# Altium PCB Safety_Lock.PcbDoc (part 1 of 2)
Units mil, origin at the board's own origin, x right, y up, seen from the top; angles counter-clockwise.
Board outline 3784.65 x 3766.54 mil, 2 copper layers (Top Layer, Bottom Layer), stack 50 mil thick; 87 components, 62 nets, 322 pads, 500 vias.
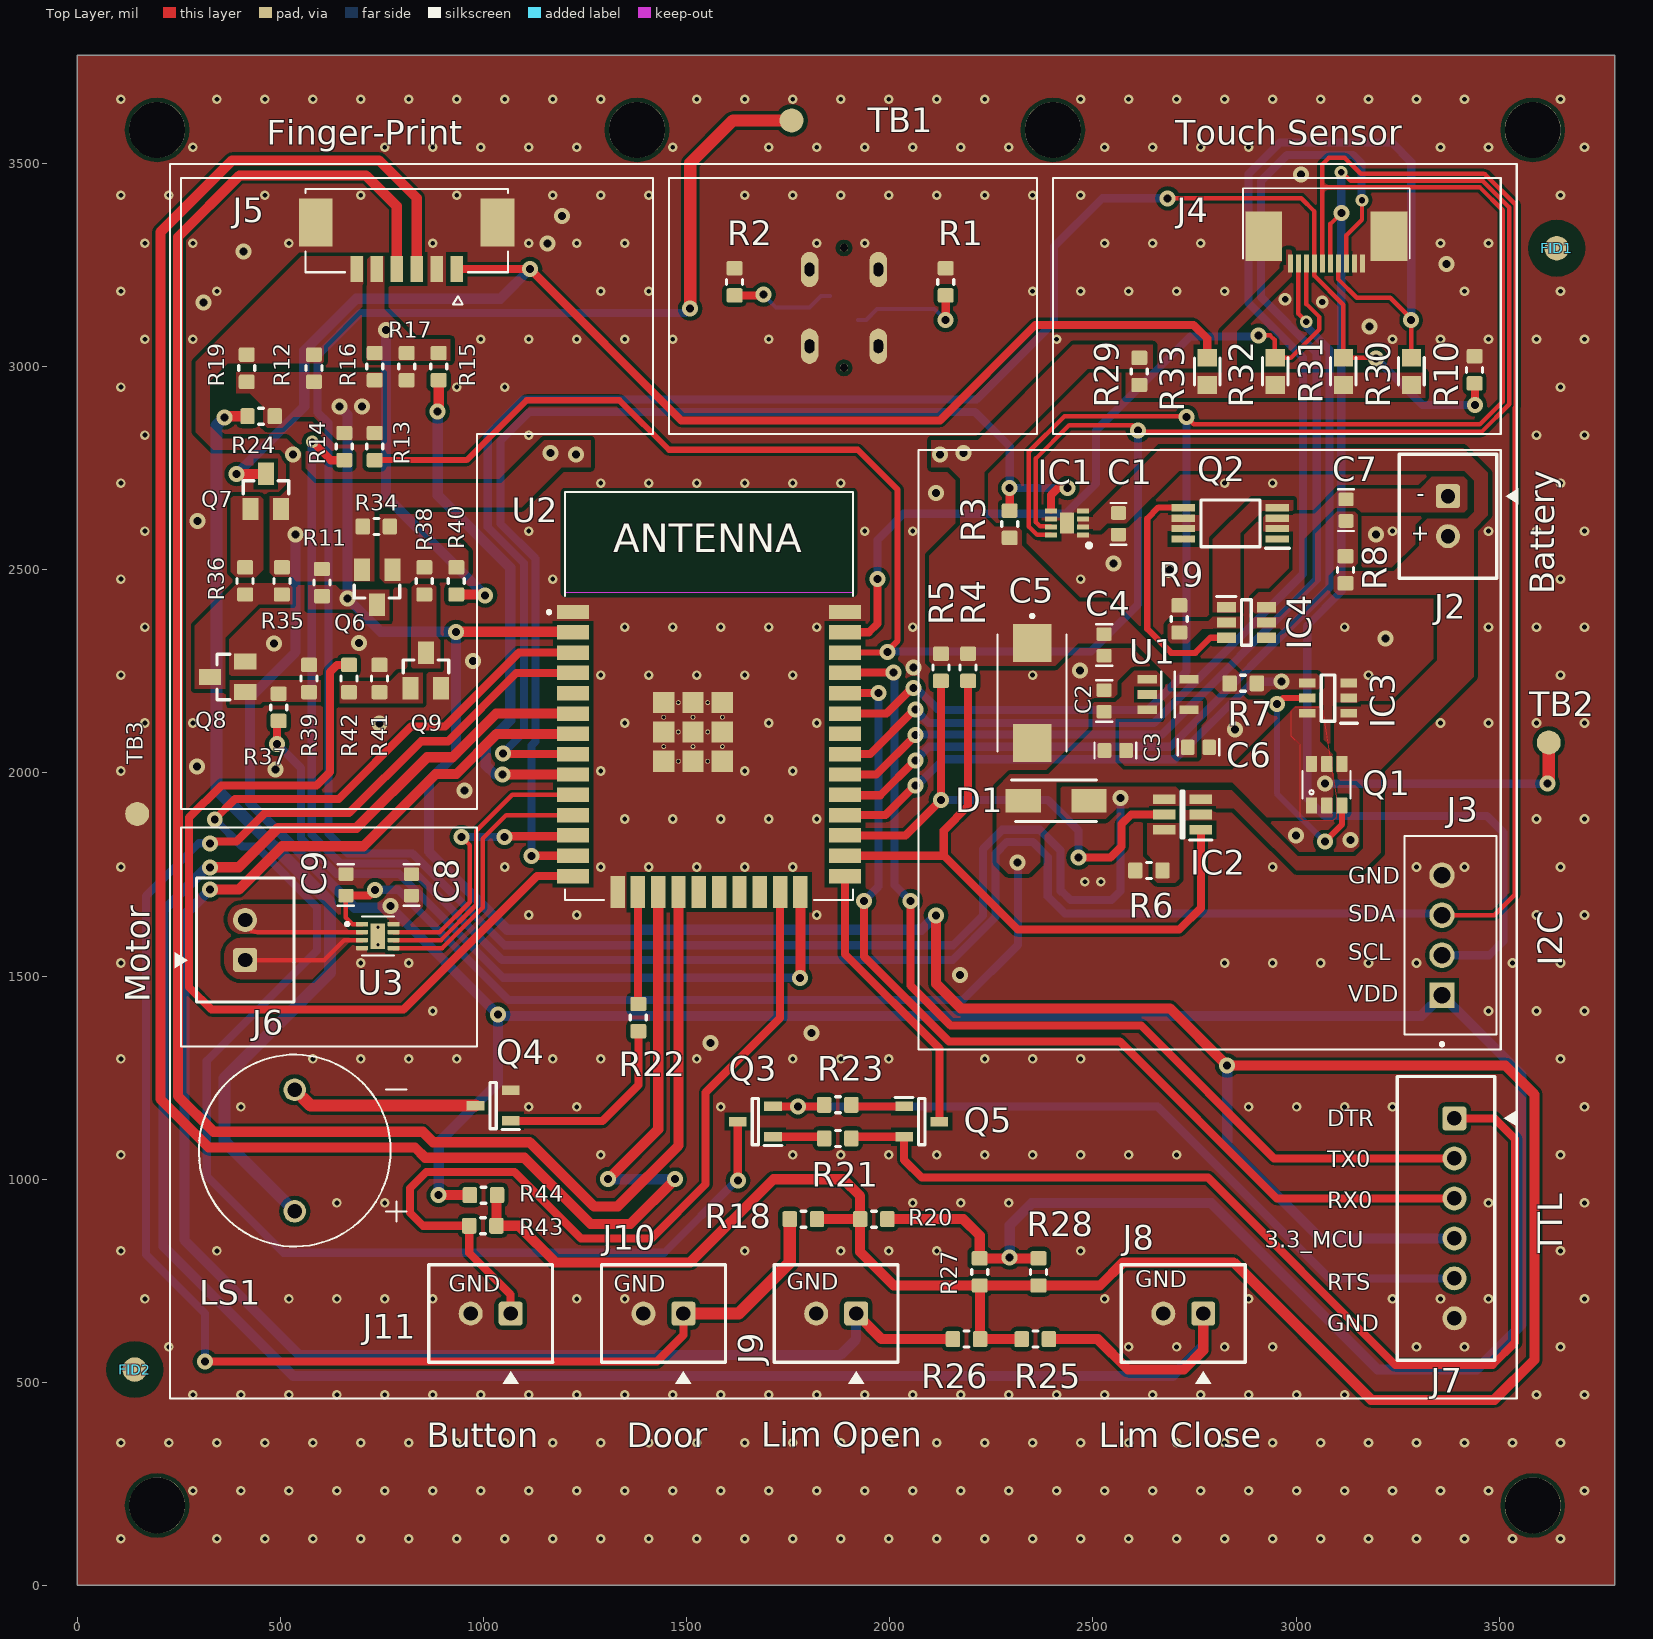
[diagram p0: Top Layer view]
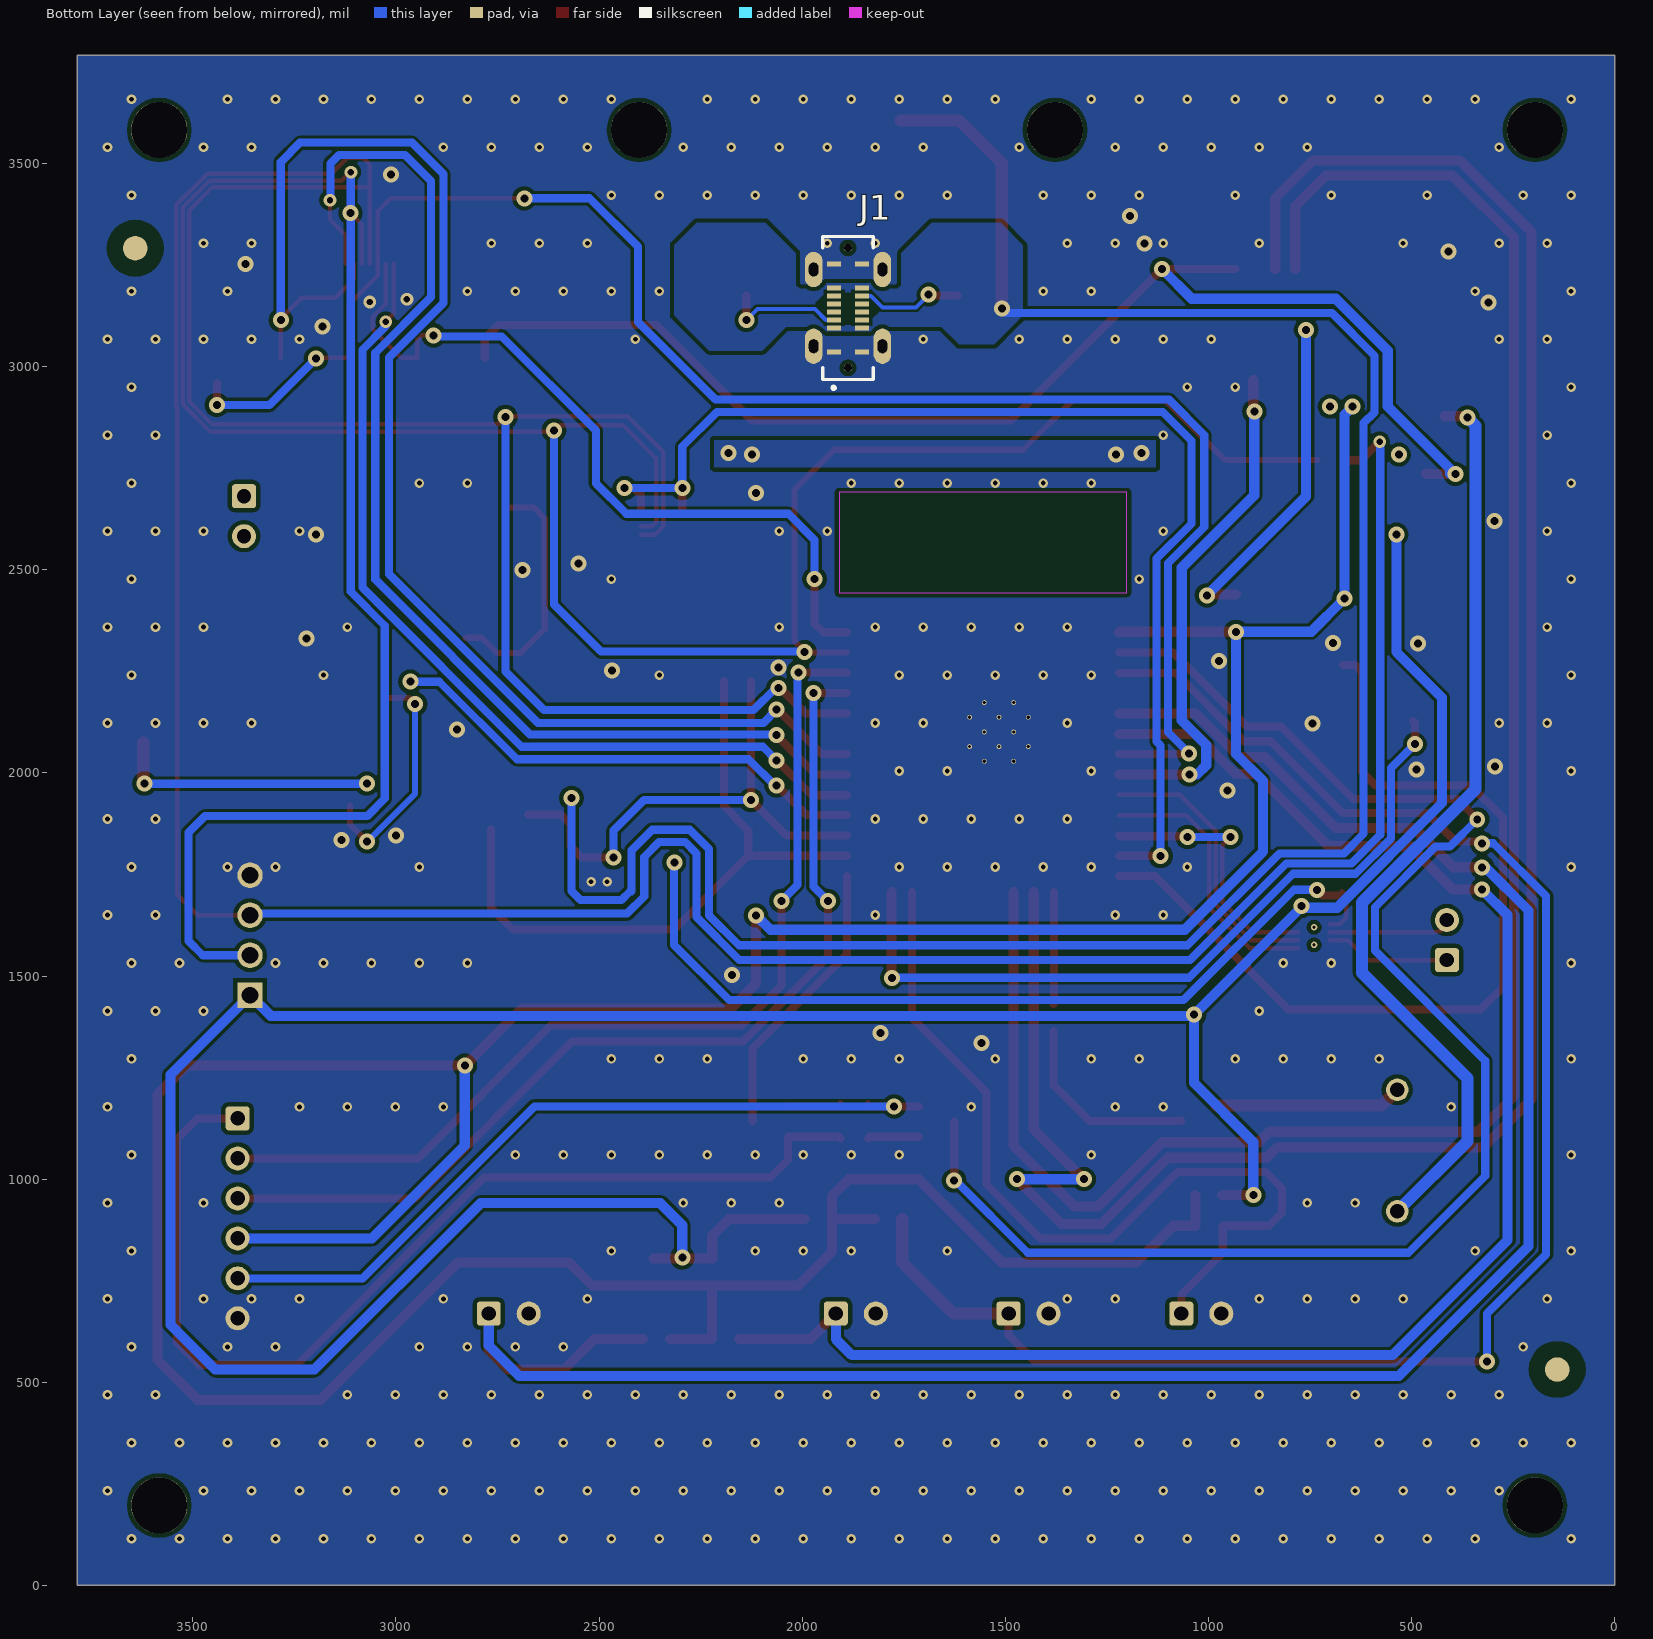
[diagram p1: Bottom Layer view, seen from below]
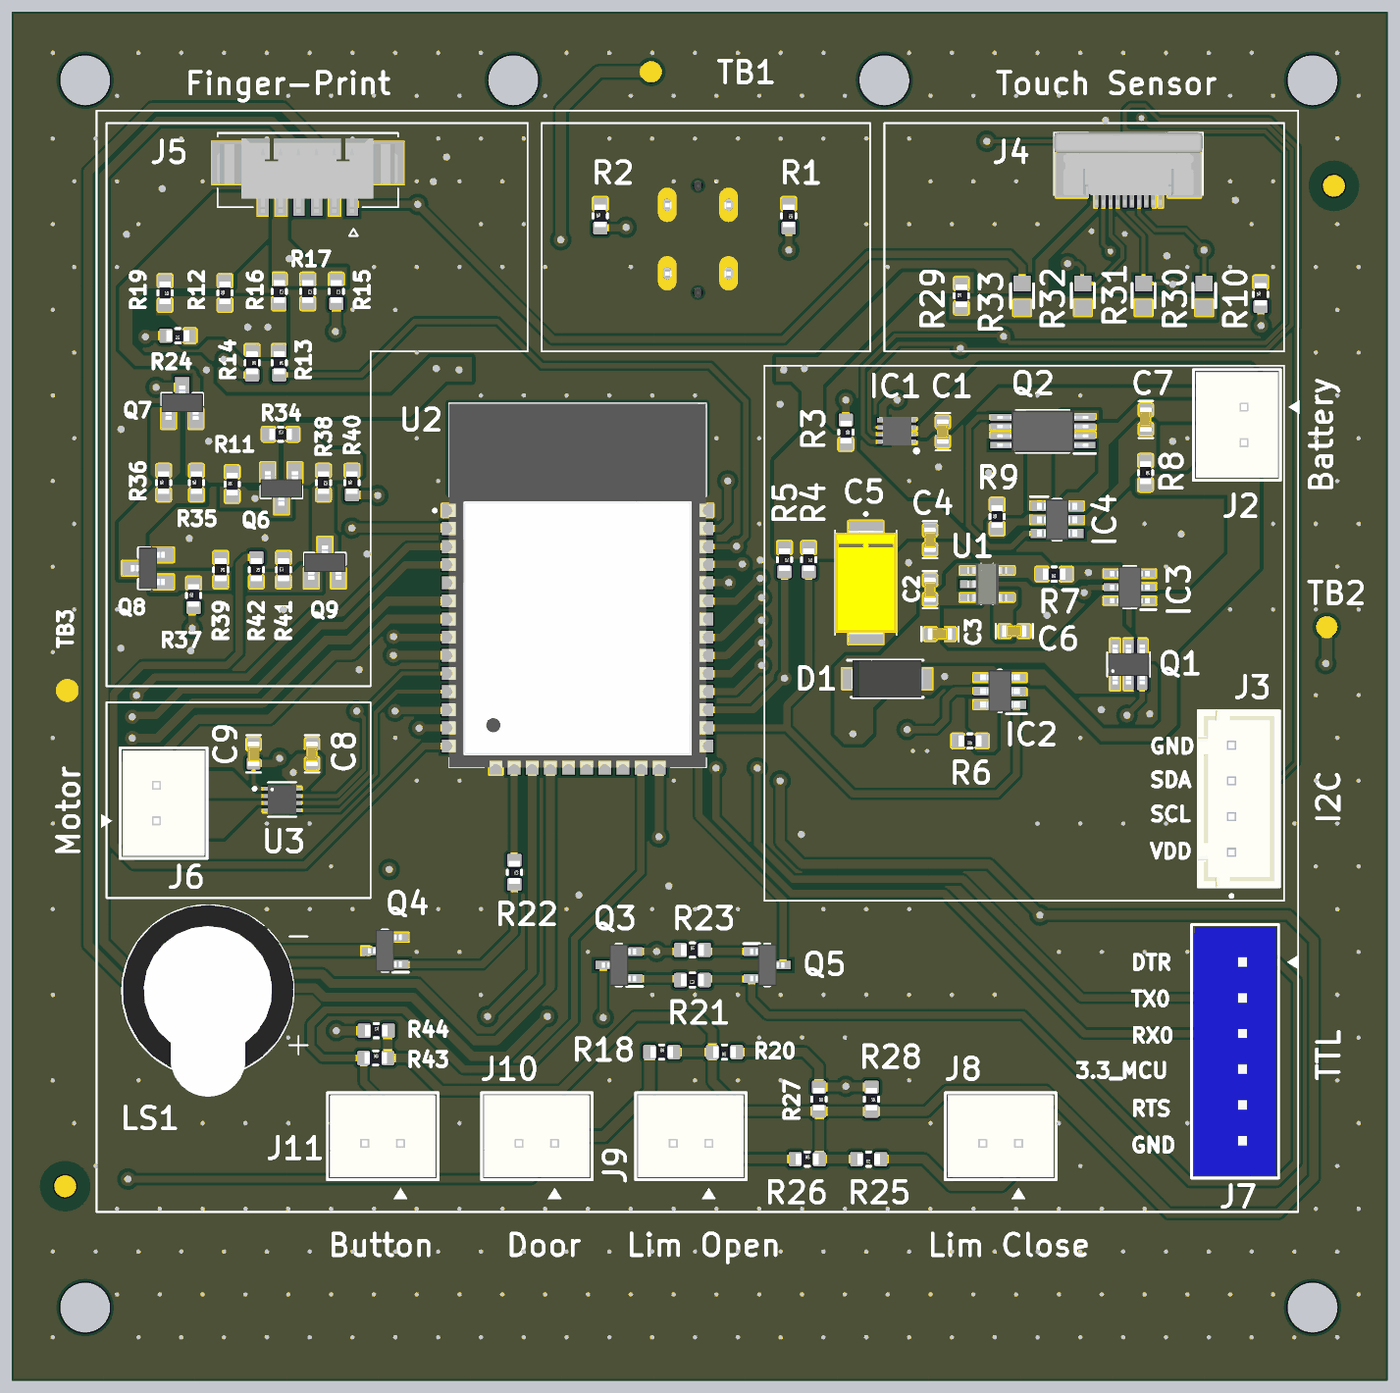
[diagram p3: 3D render of the assembled board from above, using the file's embedded part models]

## Layer stack, top to bottom
Top Solder: solder mask 0.787, Solder Resist, Dk 4.05
Top Layer: signal copper 1.378
Dielectric 1: prepreg 47.2441, PP-017, Dk 4.25
Bottom Layer: signal copper 1.378
Bottom Solder: solder mask 0.787, Solder Resist, Dk 4.05

## Board outline
0,0 0,3766.54 3784.65,3766.54 3784.64,0

## Design rules (kind name [scope] priority, off if disabled: settings)
Clearance Clearance_Fiducial [(ObjectKind = 'Pad') And (AsMils(PadXSize_AllLayers) = 60.236) And (AsMils(PadYSize_AllLayers) = 60.236)] p1: gap=39.37 ignorepadtopadclearanceinfootprint=FALSE except(0: Arc-Hole Track-Hole SMDPad-Hole THPad-Hole Via-Hole Fill-Hole Poly-Hole Region-Hole Text-Hole)
Clearance ViaToVia [IsVia vs IsVia] p2: gap=10 ignorepadtopadclearanceinfootprint=TRUE
Clearance "Stitching GND" [IsStitchingVia and InNet('GND') vs (IsVia and (Not IsStitchingVia)) Or IsPad] p3: gap=10 ignorepadtopadclearanceinfootprint=TRUE
Clearance [All] p4: gap=7 ignorepadtopadclearanceinfootprint=TRUE except(0: THPad-Region Region-Hole; 5: Arc-Track Track-Track; 10: Arc-THPad Arc-Via Track-THPad Track-Via SMDPad-THPad SMDPad-Via SMDPad-Fill SMDPad-Poly SMDPad-Region THPad-THPad THPad-Via THPad-Fill THPad-Poly Via-Via Via-Fill Via-Poly Via-Region Fill-Fill Fill-Poly Fill-Region Poly-Poly Poly-Region Region-Region)
DiffPairsRouting DiffPair_90DiffPairsRouting [InDifferentialPairClass('DIFF90')] p1: maxlimit=5 minlimit=5 mostfreqgap=5 toplayer_minwidth=8.44 toplayer_maxwidth=8.44 toplayer_prefwidth=8.44 bottomlayer_minwidth=8.44 bottomlayer_maxwidth=8.44 bottomlayer_prefwidth=8.44 impedanceprofiledriven=TRUE impedanceprofileid={2655DFD1-56F1-4E8B-8914-240DB396785B} impedanceprofilevalue=90.000000 maxuncoupledlength=500
DiffPairsRouting DiffPair_100DiffPairsRouting [InDifferentialPairClass('DIFF100')] p2: maxlimit=5 minlimit=5 mostfreqgap=5 toplayer_minwidth=6.12 toplayer_maxwidth=6.12 toplayer_prefwidth=6.12 bottomlayer_minwidth=6.12 bottomlayer_maxwidth=6.12 bottomlayer_prefwidth=6.12 impedanceprofiledriven=TRUE impedanceprofileid={77076357-942B-4C59-99A0-622BCAD36B52} impedanceprofilevalue=100.000000 maxuncoupledlength=500
FabricationTestPointUsage TestPointUsage [All] p1: valid=0 allowmultiple=FALSE
FabricationTestpoint Testpoint [(IsPad And (OnTopLayer Or OnBottomLayer))] p1: side=3 testpointundercomponent=TRUE minsize=40 maxsize=100 preferedsize=60 minholesize=0 maxholesize=40 preferedholesize=32 testpointgrid=1 allowsidetop=TRUE allowsidebottom=TRUE usegrid=TRUE gridtolerance=0.01
PlaneConnect [All] p1: planeconnectstyle=NoConnect reliefexpansion=20 reliefentries=4 reliefconductorwidth=10 reliefairgap=10
PolygonConnect VIA [ISVIA] p1: connectstyle=Direct reliefconductorwidth=30 reliefentries=4 polygonreliefangle="90 Angle" airgapwidth=10
PolygonConnect PolygonConnect_1 [All] p2: connectstyle=Direct reliefconductorwidth=20 reliefentries=4 polygonreliefangle="90 Angle" airgapwidth=10
RoutingVias [All] p1: holewidth=8 width=16 viastyle="Through Hole" minholewidth=8 minwidth=16 maxholewidth=30 maxwidth=60
SilkToSolderMaskClearance SilkscreenOverComponentPads [IsPad] p1: minsilkscreentomaskgap=10 clearancetoexposedcopper=TRUE
SolderMaskExpansion [All] p1: expansion=4 istentingtop=FALSE
UnRoutedNet [All] p1: checkbadconnections=TRUE
Width [All] p1: maxlimit=200 minlimit=5 preferedwidth=5 minimp=50.000000 maximp=50.000000 favimp=50.000000
24 further rules are at their usual default settings.

## Classes and differential pairs
component class U_Motor_Driver: C8 C9 U3
component class U_MCU: LS1 Q3 Q4 Q5 R10 R11 R12 R13 R14 R15 R16 R17 R18 R19 R20 R21 R22 R23 R24 R25 R26 R27 R28 R43 R44 U2
component class U_FingerPrint_TS: Q6 Q7 Q8 Q9 R34 R35 R36 R37 R38 R39 R40 R41 R42
component class U_Power_management: C1 C2 C3 C4 C5 C6 C7 D1 IC1 IC2 IC3 IC4 J2 Q1 Q2 R3 R4 R5 R6 R7 R8 R9 TB1 TB2 TB3 U1
component class U_Connectors: J3 J4 J5 J6 J7 J8 J9 J10 J11 R29 R30 R31 R32 R33
component class Top_level: FID1 FID2 J1 R1 R2

## Components (designator, comment, footprint, x,y, rotation, side; value= is the part's Value field where it differs from the comment)
C1 "0.1uF" 0603-C 2562.99,2613.19 r270 top
C2 "0.1uF" 0603-C 2527.56,2177.17 r90 top
C3 "22uF" 0603-C 2555.12,2055.12 r0 top
C4 "0.1uF" 0603-C 2527.56,2314.96 r270 top
C5 "T493X227K010BH6420_220uF" CAPPM7343X430N 2350.39,2196.85 r270 top
C6 "10nF" 0603-C 2759.84,2062.99 r0 top
C7 "0.1uF" 0603-C 3123.03,2646.65 r90 top
C8 "0.1uF" 0603-C 822.83,1724.41 r90 top
C9 "0.1uF" 0603-C 661.42,1724.41 r90 top
D1 "SS34A" DIOM5026X262N 2409.45,1931.52 r0 top
FID1 "fiducial" Fiducial 3641.73,3291.34 r90 top
FID2 "fiducial" Fiducial 141.73,531.5 r90 top
IC1 "MAX17048G+T10" SON50P200X200X80-9N-D 2436.21,2615.16 r180 top
IC2 "TP4057-42-SOT26-R" SOT95P280X125-6N 2720.47,1897.64 r180 top
IC3 "LTC4412HVIS6#TRMPBF" SOT95P280X100-6N 3078.74,2183.98 r180 top
IC4 "DW01A-G" SOT95P280X135-6N 2877.95,2370.08 r0 top
J1 "USB4120-03-C_REVA" GCT_USB4120-03-C_REVA 1887.32,3144.61 r90 bottom
J2 "455-2247-ND" CON_HDR1x2 3374.02,2681.1 r270 top
J3 "B4B-XH-A(LF)(SN)" JST_B4B-XH-A(LF)(SN) 3359.25,1452.76 r90 top
J4 "1-1734592-0" 117345920 3074.8,3346.26 r180 top
J5 "532610671" MOLEX_532610671 811.02,3334.65 r180 top
J6 "455-2247-ND" CON_HDR1x2 413.39,1539.37 r90 top
J7 "B6B-XH-A" CON_HDR1x6_2p50_SHRD_JST-B6B-XH-A 3389.76,1149.61 r270 top
J8 "455-2247-ND" CON_HDR1x2 2771.65,669.29 r180 top
J9 "455-2247-ND" CON_HDR1x2 1917.32,669.29 r180 top
J10 "455-2247-ND" CON_HDR1x2 1492.13,669.29 r180 top
J11 "455-2247-ND" CON_HDR1x2 1066.93,669.29 r180 top
LS1 "AI-1223-TWT-3V-2-R" XDCR_AI-1223-TWT-3V-2-R 535.37,1070.46 r180 top
Q1 "FDC606P" SUPERSOT-6 3075.48,1971.02 r0 top
Q2 "FS8205A" SOP65P640X120-8N 2838.58,2614.17 r180 top
Q3 "MMBT2222A-G" SOT95P240X115-3N 1669.29,1141.73 r180 top
Q4 "MMBT2222A-G" SOT95P240X115-3N 1023.62,1181.1 r180 top
Q5 "MMBT2222A-G" SOT95P240X115-3N 2078.74,1141.73 r0 top
Q6 "MI2301" SOT23 738.19,2456.69 r180 top
Q7 "KST8550D" SOT23 464.57,2692.91 r0 top
Q8 "MMBT8050D" SOT23 370.08,2236.22 r90 top
Q9 "MMBT8050D" SOT23 858.27,2251.97 r0 top
R1 "5.1k" 0603-R 2137.8,3208.66 r270 top
R2 "5.1k" 0603-R 1618.11,3208.66 r90 top
R3 "4.7k" 0603-R 2295.28,2612.14 r270 top
R4 "4.7k" 0603-R 2192.91,2259.84 r270 top
R5 "4.7k" 0603-R 2125.98,2259.84 r270 top
R6 "1.66k" 0603-R 2637.8,1759.84 r180 top
R7 "470k" 0603-R 2870.08,2220.47 r180 top
R8 "100R" 0603-R 3122.05,2500 r270 top
R9 "1k" 0603-R 2712.6,2379 r90 top
R10 "4.7K" 0603-R 3439.61,2992.13 r90 top
R11 "NC" 0603-R 602.36,2468.5 r90 top
R12 "NC" 0603-R 582.68,2996.06 r90 top
R13 "4.7K" 0603-R 732.28,2803.15 r270 top
R14 "4.7K" 0603-R 657.48,2803.15 r270 top
R15 "0R" 0603-R 889.76,3000 r270 top
R16 "4.7K" 0603-R 732.28,3000 r270 top
R17 "4.7K" 0603-R 811.02,3000 r270 top
R18 "4.7K" 0603-R 1787.4,901.57 r0 top
R19 "NC" 0603-R 417.32,2996.06 r270 top
R20 "NC" 0603-R 1960.63,901.57 r180 top
R21 "12k" 0603-R 1872.05,1100.39 r180 top
R22 "220R" 0603-R 1381.17,1397.64 r270 top
R23 "12k" 0603-R 1872.05,1183.07 r0 top
R24 "100R" 0603-R 452.76,2877.95 r180 top
R25 "4.7K" 0603-R 2358.27,606.3 r180 top
R26 "4.7K" 0603-R 2188.98,606.3 r0 top
R27 "NC" 0603-R 2221.39,771.65 r270 top
R28 "NC" 0603-R 2366.14,771.65 r270 top
R29 "NC" 0603-R 2614.17,2988.19 r90 top
R30 "10K" 0603R 3283.92,2988.19 r90 top value=1K
R31 "10K" 0603R 3116.49,2988.19 r90 top value=1K
R32 "10K" 0603R 2949.05,2988.19 r90 top value=1K
R33 "0R" 0603R 2781.61,2988.19 r270 top value=1K
R34 "100K" 0603-R 736.22,2606.3 r0 top
R35 "100K" 0603-R 503.94,2472.44 r90 top
R36 "1K" 0603-R 413.39,2472.44 r90 top
R37 "1K" 0603-R 496.06,2161.42 r90 top
R38 "1K" 0603-R 854.33,2472.44 r270 top
R39 "10K" 0603-R 570.87,2232.28 r270 top
R40 "1K" 0603-R 933.07,2472.44 r90 top
R41 "10K" 0603-R 744.09,2232.28 r90 top
R42 "1K" 0603-R 669.29,2232.28 r270 top
R43 "4.7K" 0603-R 998.47,885.33 r0 top
R44 "NC" 0603-R 1000,960.63 r0 top
TB1 "Test_Pad" Test_Pad 1758.4,3605.96 r0 top
TB2 "Test_Pad" Test_Pad 3622.05,2074.8 r90 top
TB3 "Test_Pad" Test_Pad 147.64,1899.16 r90 top
U1 "SPX3819M5-L-3-3/TR" SOT23-5 2685.04,2192.91 r180 top
U2 "Esp32" MODULE_ESP32-WROOM-32 1555.12,2188.98 r0 top
U3 "DRV8837CDSGR" SON50P200X200X80-9N 740.16,1598.42 r0 top

## Footprints (in the part's own frame and the unit in brackets; to place one, negate y for a bottom-side part, rotate by r counter-clockwise, add the part's x,y. Pads: shape width x height; smd on the part's side, far side on the other; paste and mask are expansions set on the pad)
0603-C [mm] "Capacitor 0603 Nominal Density"
  rrect25% 0.85x0.95 smd: 1(-0.675,0) 2(0.675,0)
  silkscreen extent -1.3,-0.5 1.3,0.5, body extent -0.88,-0.43 0.87,0.44, height 0.95
0603-R [mm] "Resistor 0603 Medium Density"
  rrect25% 0.9x1 smd: 1(-0.85,0) 2(0.85,0)
  silkscreen extent -0.15,-0.5 0.15,0.5, body extent -0.8,-0.4 0.8,0.4, height 0.3
0603R [mm]
  rect 1.1x1.2 smd: 1(-0.85,0) 2(0.85,0)
  silkscreen extent -0.85,-0.8 0.86,0.8
117345920 [mm]
  rect 0.3x1.1 smd: 1(-2.25,2.35) 2(-1.75,2.35) 3(-1.25,2.35) 4(-0.75,2.35) 5(-0.25,2.35) 6(0.25,2.35) 7(0.75,2.35) 8(1.25,2.35) 9(1.75,2.35) 10(2.25,2.35)
  rect 2.3x3.1 smd: MP1(-3.92,0.65) MP2(3.92,0.65)
  silkscreen extent -5.22,-2.35 5.22,2.05, body extent -5.22,-2.37 5.22,2.74, height 2.05
CAPPM7343X430N [mm]
  rect 2.37x2.41 smd: 1(-3.125,0) 2(3.125,0)
  silkscreen extent -4.91,-2.15 3.65,2.15, body extent -3.65,-2.15 3.65,2.15, height 4.3
CON_HDR1x2 [mm] "Connector 2-Way 2.50mm Pitch Right Angle Shrouded JST S2B-XH-A"
  rrect25% 1.5x1.5 / inner round 1.5 / far side rrect25% 1.5x1.5 hole 0.9: 1(0,0)
  round 1.5 hole 0.9: 2(2.5,0)
  silkscreen extent -2.63,-3.05 5.13,4.4, body extent -2.45,-2.88 4.95,2.87, height 7
CON_HDR1x6_2p50_SHRD_JST-B6B-XH-A [mm] "Connector 6-Way 2.50mm Pitch Right Angle Shrouded JST-B6B-XH-A"
  rrect25% 1.5x1.5 / inner round 1.5 / far side rrect25% 1.5x1.5 hole 0.9: 1(0,0)
  round 1.5 hole 0.9: 2(2.5,0) 3(5,0) 4(7.5,0) 5(10,0) 6(12.5,0)
  silkscreen extent -2.62,-3.58 15.13,3.9, body extent -2.45,-3.38 14.95,2.37, height 7
DIOM5026X262N [mm]
  rect 2.2x1.45 smd: 1(-2.05,0) 2(2.05,0)
  silkscreen extent -2.78,-1.3 2.52,1.3, body extent -2.52,-1.3 2.52,1.3, height 2.62
Fiducial [mm]
  round 1.53 all layers, no hole mask+0.102: 1(0,0)
GCT_USB4120-03-C_REVA [mm]
  rect 0.3x0.87 smd: A1(-2.75,0.865) A4(-1.25,0.865) A5(-0.75,0.865) A6(-0.25,0.865) A7(0.25,0.865) A8(0.75,0.865) A9(1.25,0.865) A12(2.75,0.865) B1(2.75,-0.865) B4(1.25,-0.865) B5(0.75,-0.865) B6(0.25,-0.865) B7(-0.25,-0.865) B8(-0.75,-0.865) B9(-1.25,-0.865) B12(-2.75,-0.865)
  oval 2.2x1.1 hole 0.6 slot 0.85 at 0 deg: S1(-2.4,2.15) S2(-2.4,-2.15) S3(2.4,2.15) S4(2.4,-2.15)
  round 0.52 hole 0.52 unplated: ""(-3.75,0) ""(3.75,0)
  silkscreen extent -5.1,-1.58 4.47,1.58, body extent -4.5,-2.29 4.44,2.31, height 6.5
JST_B4B-XH-A(LF)(SN) [mm]
  rect 1.59x1.59 hole 1.06: 1(0,0)
  round 1.59 hole 1.06: 2(2.5,0) 3(5,0) 4(7.5,0)
  silkscreen extent -3.16,-3.4 9.95,2.35, body extent -2.45,-3.4 9.95,2.35, height 7
MODULE_ESP32-WROOM-32 [mm]
  rect 2x0.9 smd: 1(-8.5,5.26) 2(-8.5,3.99) 3(-8.5,2.72) 4(-8.5,1.45) 5(-8.5,0.18) 6(-8.5,-1.09) 7(-8.5,-2.36) 8(-8.5,-3.63) 9(-8.5,-4.9) 10(-8.5,-6.17) 11(-8.5,-7.44) 12(-8.5,-8.71) 13(-8.5,-9.98) 14(-8.5,-11.25) 25(8.5,-11.25) 26(8.5,-9.98) 27(8.5,-8.71) 28(8.5,-7.44) 29(8.5,-6.17) 30(8.5,-4.9) 31(8.5,-3.63) 32(8.5,-2.36) 33(8.5,-1.09) 34(8.5,0.18) 35(8.5,1.45) 36(8.5,2.72) 37(8.5,3.99) 38(8.5,5.26)
  rect 0.9x2 smd: 15(-5.715,-12.25) 16(-4.445,-12.25) 17(-3.175,-12.25) 18(-1.905,-12.25) 19(-0.635,-12.25) 20(0.635,-12.25) 21(1.905,-12.25) 22(3.175,-12.25) 23(4.445,-12.25) 24(5.715,-12.25)
  rect 1.33x1.33 smd: 39_1(-2.835,-0.405) 39_2(-1,-0.405) 39_3(0.835,-0.405) 39_4(-2.835,-2.24) 39_5(-1,-2.24) 39_6(0.835,-2.24) 39_7(-2.835,-4.075) 39_8(-1,-4.075) 39_9(0.835,-4.075)
  round 0.3 hole 0.2: 39_10(-1.917,-0.405) 39_11(-0.082,-0.405) 39_12(-2.835,-1.322) 39_13(-1,-1.322) 39_14(0.835,-1.322) 39_15(-1.917,-2.24) 39_16(-0.082,-2.24) 39_17(-2.835,-3.157) 39_18(-1,-3.157) 39_19(0.835,-3.157) 39_20(-1.917,-4.075) 39_21(-0.082,-4.075)
  Keep-Out Layer region: 9,6.45 -9,6.45 -9,12.75 9,12.75
  Keep-Out Layer region: 9,6.45 -9,6.45 -9,12.75 9,12.75
  silkscreen extent -10.1,-12.75 9,12.75, body extent -9,-12.75 9,12.75, height 3.2
MOLEX_532610671 [mm]
  rect 0.8x1.6 smd mask+0: 1(-3.125,2.4) 2(-1.875,2.4) 3(-0.625,2.4) 4(0.625,2.4) 5(1.875,2.4) 6(3.125,2.4)
  rect 2.1x3 smd mask+0: S1(-5.675,-0.5) S2(5.675,-0.5)
  silkscreen extent -6.32,-2.6 6.32,4.6, body extent -6.3,-2.22 6.35,2.98, height 3.4
SON50P200X200X80-9N [mm]
  rrect25% 0.74x0.28 smd: 1(-0.985,0.75) 2(-0.985,0.25) 3(-0.985,-0.25) 4(-0.985,-0.75) 5(0.985,-0.75) 6(0.985,-0.25) 7(0.985,0.25) 8(0.985,0.75)
  rect 0.9x1.6 smd paste-2: 9(0,0)
  round 0.4 hole 0.2 mask+0: 9_1(0,0.55) 9_2(0,-0.55)
  silkscreen extent -2.02,-1.21 1,1.21, body extent -1,-1 1,1, height 0.8
SON50P200X200X80-9N-D [mm]
  rect 0.75x0.3 smd: 1(-1,0.75) 2(-1,0.25) 3(-1,-0.25) 4(-1,-0.75) 5(1,-0.75) 6(1,-0.25) 7(1,0.25) 8(1,0.75)
  rect 0.9x1.3 smd: 9(0,0)
  silkscreen extent -1.5,1.28 -1.25,1.52, body extent -1.05,-1 1.05,1, height 0.8
SOP65P640X120-8N [mm]
  rect 1.475x0.45 smd: 1(-2.938,0.975) 2(-2.938,0.325) 3(-2.938,-0.325) 4(-2.938,-0.975) 5(2.938,-0.975) 6(2.938,-0.325) 7(2.938,0.325) 8(2.938,0.975)
  silkscreen extent -3.67,-1.47 1.85,1.55, body extent -3.2,-1.47 3.2,1.47, height 1.2
SOT23 [mm]
  rect 1x1.4 smd: 1(-0.95,-1.1) 2(0.95,-1.1) 3(0,1.1)
  silkscreen extent -1.42,-0.15 1.42,0.66, body extent -1.45,-1.2 1.45,1.2, height 1.11
SOT23-5 [mm]
  rect 1.2x0.55 smd: 1(1.3,-0.95) 2(1.3,0) 3(1.3,0.95) 4(-1.3,0.95) 5(-1.3,-0.95)
  silkscreen extent -0.43,-1.42 0.43,1.42, body extent -1.4,-1.45 1.4,1.45, height 1.45
SOT95P240X115-3N [mm]
  rect 1.1x0.6 smd: 1(-1.1,0.95) 2(-1.1,-0.95) 3(1.1,0)
  silkscreen extent -1.65,-1.45 0.2,1.5, body extent -1.2,-1.45 1.2,1.45, height 1.15
SOT95P280X100-6N [mm]
  rect 1.05x0.55 smd: 1(-1.3,0.95) 2(-1.3,0) 3(-1.3,-0.95) 4(1.3,-0.95) 5(1.3,0) 6(1.3,0.95)
  silkscreen extent -1.83,-1.45 0.43,1.58, body extent -1.4,-1.45 1.4,1.45, height 1
SOT95P280X125-6N [mm]
  rect 1.4x0.6 smd: 1(-1.15,0.95) 2(-1.15,0) 3(-1.15,-0.95) 4(1.15,-0.95) 5(1.15,0) 6(1.15,0.95)
  silkscreen extent -1.85,-1.46 0.1,1.6, body extent -1.4,-1.46 1.4,1.46, height 1.25
SOT95P280X135-6N [mm]
  rect 1.2x0.65 smd: 1(-1.25,0.95) 2(-1.25,0) 3(-1.25,-0.95) 4(1.25,-0.95) 5(1.25,0) 6(1.25,0.95)
  silkscreen extent -1.85,-1.43 0.3,1.63, body extent -1.4,-1.43 1.4,1.43, height 1.35
SUPERSOT-6 [mm]
  rrect15% 0.7x1 smd: 1(-0.95,-1.3) 2(0,-1.3) 3(0.95,-1.3) 4(0.95,1.3) 5(0,1.3) 6(-0.95,1.3)
  silkscreen extent -1.5,-0.85 1.5,0.85, body extent -1.45,-1.4 1.45,1.4, height 1
Test_Pad [mil]
  round 59.06 smd paste-29.53 mask+2: 1(0,0)
XDCR_AI-1223-TWT-3V-2-R [mm]
  round 1.408 hole 0.9: N(0,-3.8) P(0,3.8)
  silkscreen extent -6.98,-6 6,6, body extent -6.01,-6.03 5.99,7.41, height 7.65

## Part data
C1 C2 C3 C4 C6 C7 C8 C9: library part CAP, "CAP", Capacitance=1uF, Case Code (Imperial)=0805, Case Code (Metric)=2012, Manufacturer="TDK EPCOS", Manufacturer Part Number=B37941K9105K62, Max Operating Temperature=125°C, Min Operating Temperature=-55°C, Package Quantity=3000, Ratings=AEC-Q200, Supplier Part Number 1=495-1935-1-ND, Tolerance=10%, Voltage Rating=16V, Case/Package=0805, Category="Ceramic Capacitors", ComponentLink1Description=Datasheet, ComponentLink1URL=https://datasheet.ciiva.com/13389/upy-gphc-y5v-6-3v-to-50v-5-13389978.pdf?src-supplier=Mouser, ComponentLink2Description=http://components.arrow.com/part/dataview/0323_01879911?src-supplier=Arrow+Europe, ComponentLink2URL=http://components.arrow.com/part/dataview/0323_01879911?src-supplier=Arrow+Europe, ComponentLink3Description=https://media.digikey.com/pdf/Data%20Sheets/Epcos%20PDFs/B37872K_B37941K_Series.pdf?src-supplier=Digi-Key, ComponentLink3URL=https://media.digikey.com/pdf/Data%20Sheets/Epcos%20PDFs/B37872K_B37941K_Series.pdf?src-supplier=Digi-Key, Height=1.35mm, Lead Free="Lead Free", Length=0.079inch, Mount="Surface Mount", Packaging="Tape and Reel", RoHS=Yes, Supplier 1=Digi-Key, Thickness=0.049inch, Voltage Rating (DC)=16V, Width=0.049inch
C5: Package="SMD-2 Kemet", Availability="In Stock", Check_prices=https://www.snapeda.com/parts/T493X227K010BH6420/Kemet/view-part/?ref=eda, MF=Kemet, MP=T493X227K010BH6420, Price=None, SnapEDA_Link=https://www.snapeda.com/parts/T493X227K010BH6420/Kemet/view-part/?ref=snap
D1: "Diode", Manufacturer_Name="HY Electronic Corp", Datasheet Link=https://datasheet.datasheetarchive.com/originals/distributors/Datasheets-3/DSA-43252.pdf, Height=2.62mm, Manufacturer_Part_Number=SS34A
IC1: "Integrated Circuit", Manufacturer_Name="Maxim Integrated", Mouser Part Number=700-MAX17048G+T10, Arrow Part Number=MAX17048G+T10, Arrow Price/Stock=https://www.arrow.com/en/products/max17048gt10/maxim-integrated?region=nac, Datasheet Link=https://datasheets.maximintegrated.com/en/ds/MAX17048-MAX17049.pdf, Height=0.8mm, Manufacturer_Part_Number=MAX17048G+T10, Mouser Price/Stock=https://www.mouser.co.uk/ProductDetail/Maxim-Integrated/MAX17048G%2bT10?qs=D7PJwyCwLAoGnnn8jEPRBQ%3D%3D
IC2: "Integrated Circuit", Manufacturer_Name="Nanjing Extension Microelectronics", Datasheet Link=https://datasheet.lcsc.com/szlcsc/Nanjing-Extension-Microelectronics-TP4057_C12044.pdf, Height=1.25mm, Manufacturer_Part_Number=TP4057-42-SOT26-R
IC3: "Integrated Circuit", Manufacturer_Name="Linear Technology", Mouser Part Number=584-C4412HVIS6TRMPBF, Arrow Part Number=LTC4412HVIS6#TRMPBF, Arrow Price/Stock=https://www.arrow.com/en/products/ltc4412hvis6trmpbf/linear-technology, Datasheet Link=https://datasheet.datasheetarchive.com/originals/dk/DKDS-14/267243.pdf, Height=1mm, Manufacturer_Part_Number=LTC4412HVIS6#TRMPBF, Mouser Price/Stock=https://www.mouser.co.uk/ProductDetail/Analog-Devices-Linear-Technology/LTC4412HVIS6TRMPBF?qs=hVkxg5c3xu%2F0qD9zc%2Fd4vw%3D%3D
IC4: "Integrated Circuit", Manufacturer_Name="Fortune Semiconductor Corporation", Datasheet Link=http://acoptex.com/uploads/DW01A.pdf, Height=1.35mm, Manufacturer_Part_Number=DW01A-G
J1: Package=None, Availability=Unavailable, Check_prices=https://www.snapeda.com/parts/USB4120-03-C/Global%20Connector%20Technology/view-part/5160677/?ref=eda, MF="Global Connector Technology", MP=USB4120-03-C, Price=None, SnapEDA_Link=https://www.snapeda.com/parts/USB4120-03-C/Global%20Connector%20Technology/view-part/5160677/?ref=snap
J2 J6 J8 J9 J10 J11: library part CON_HDR1x2, ComponentLink1Description=Datasheet, ComponentLink1URL=https://www.jst-mfg.com/product/pdf/eng/eXH.pdf
J3: "Connector Header Through Hole 4 position 0.098 (2.50mm)", Package=None, Availability=Warning, Check_prices=https://www.snapeda.com/parts/B4B-XH-A(LF)(SN)/JST%20Sales%20America%20Inc./view-part/447494/?ref=eda, MF="JST Sales", MP=B4B-XH-A(LF)(SN), Price=None, Purchase-URL=https://pricing.snapeda.com/search/part/B4B-XH-A(LF)(SN)/?ref=eda, SnapEDA_Link=https://www.snapeda.com/parts/B4B-XH-A(LF)(SN)/JST%20Sales%20America%20Inc./view-part/447494/?ref=snap
J4: "Connector", Manufacturer_Name="TE Connectivity", Mouser Part Number=571-1-1734592-0, Arrow Part Number=1-1734592-0, Arrow Price/Stock=https://www.arrow.com/en/products/1-1734592-0/te-connectivity, Datasheet Link=https://www.te.com/commerce/DocumentDelivery/DDEController?Action=showdoc&DocId=Customer+Drawing%7F1734592%7FC%7Fpdf%7FEnglish%7FENG_CD_1734592_C_C_1734592.pdf%7F1-1734592-8, Height=2.3mm, Manufacturer_Part_Number=1-1734592-0, Mouser Price/Stock=https://www.mouser.co.uk/ProductDetail/TE-Connectivity/1-1734592-0?qs=sXy4Dx%2FMQpOH8ogf8%2FvwBg%3D%3D
J5: "Conn Shrouded Header (4 Sides) HDR 6 POS 1.25mm Solder RA Side Entry SMD PicoBladeâ„¢ T/R", Package=None, Check_prices=https://www.snapeda.com/parts/532610671/Molex/view-part/6379096/?ref=eda, Digi-Key_Part_Number=WM7624CT-ND, MF=Molex, MP=532610671, Purchase-URL=https://pricing.snapeda.com/search/part/532610671/?ref=eda, SnapEDA_Link=https://www.snapeda.com/parts/532610671/Molex/view-part/6379096/?ref=snap
J7: library part CON_HDR1x6_2p50_SHRD_JST_B6B-XH-A, "CONN HEADER VERT 6POS 2.5MM", Color=Natural, Contact Resistance=20mR, Current Rating=3A, Housing Color=White, Insulation Resistance=1GR, Manufacturer=JST, Manufacturer Part Number=B6BXHA(LF)(SN), Max Operating Temperature=85°C, Max Voltage Rating (AC)=250V, Min Operating Temperature=-25°C, Package Quantity=500, Supplier Part Number 1=455-2271-ND, Category="FFC / FPC", ComponentLink4Description=Datasheet, ComponentLink4URL=http://www.jst-mfg.com/product/pdf/eng/eXH.pdf, Connector Type="Male Pin", Contact Material=Brass, Contact Plating=Tin,Lead,Copper, Depth=5.75mm, Housing Material=Polyamide, Lead Free="Lead Free", Lead Pitch=2.5mm, Length=17.4mm, Max Current Rating=3A, Max Voltage Rating (DC)=250V, Mount="Through Hole", Number of Contacts=6, Number of Positions=6, Number of Rows=1, Orientation=Straight, Packaging=Bulk, Pitch=2.5mm, Pricing 1="1=0.270000, 10=0.258000, 100=0.180800, 500=0.154940, 1000=0.129120, 5000=0.110680, 10000=0.103300 (USD)", REACH SVHC="No SVHC", RoHS=Yes, Stock 1=19126, Supplier 1=Digi-Key, Termination=Press-Fit, Voltage Rating=250V, Voltage Rating (AC)=250V, Wire/Cable Gauge=22AWG
LS1: "AUDIO INDICATOR 82 DB 3 VDC 2300 HZ", Package=None, Availability="In Stock", Check_prices=https://www.snapeda.com/parts/AI-1223-TWT-3V-2-R/PUI%20Audio,%20Inc./view-part/548758/?ref=eda, MF="PUI Audio,", MP=AI-1223-TWT-3V-2-R, Price=None, Purchase-URL=https://pricing.snapeda.com/search/part/AI-1223-TWT-3V-2-R/?ref=eda, SnapEDA_Link=https://www.snapeda.com/parts/AI-1223-TWT-3V-2-R/PUI%20Audio,%20Inc./view-part/548758/?ref=snap
Q1: "P-Channel 12V 6A (Ta) 1.6W (Ta) Surface Mount SuperSOTâ„¢-6", Package="TSOT-23-6 ON Semiconductor", Availability=Good, Check_prices=https://www.snapeda.com/parts/FDC606P/ON%20Semiconductor/view-part/2501971/?ref=eda, MF="ON Semiconductor", MP=FDC606P, Price=None, Purchase-URL=https://pricing.snapeda.com/search/part/FDC606P/?ref=eda, SnapEDA_Link=https://www.snapeda.com/parts/FDC606P/ON%20Semiconductor/view-part/2501971/?ref=snap
Q2: "Transistor", Manufacturer_Name="SII Semiconductor", Datasheet Link=http://www.ic-fortune.com/upload/Download/FS8205A-DS-12_EN.pdf, Height=1.2mm, Manufacturer_Part_Number=FS8205A
Q3: library part MMBT2222A-G_Mirror, "Transistor BJT NPN", Manufacturer_Name="Comchip Technology", Mouser Part Number=750-MMBT2222A-G, Arrow Part Number=MMBT2222A-G, Arrow Price/Stock=https://www.arrow.com/en/products/mmbt2222a-g/comchip-technology, Datasheet Link=http://www.comchiptech.com/admin/files/product/MMBT2222A-G%20RevB.pdf, Height=1.15mm, Manufacturer_Part_Number=MMBT2222A-G, Mouser Price/Stock=https://www.mouser.co.uk/ProductDetail/Comchip-Technology/MMBT2222A-G?qs=2qJf6qQ4IOIM%2FSE9iCL8gQ%3D%3D
Q4 Q5: "Transistor BJT NPN", Manufacturer_Name="Comchip Technology", Mouser Part Number=750-MMBT2222A-G, Arrow Part Number=MMBT2222A-G, Arrow Price/Stock=https://www.arrow.com/en/products/mmbt2222a-g/comchip-technology, Datasheet Link=http://www.comchiptech.com/admin/files/product/MMBT2222A-G%20RevB.pdf, Height=1.15mm, Manufacturer_Part_Number=MMBT2222A-G, Mouser Price/Stock=https://www.mouser.co.uk/ProductDetail/Comchip-Technology/MMBT2222A-G?qs=2qJf6qQ4IOIM%2FSE9iCL8gQ%3D%3D
Q7: "Trans GP BJT PNP 45V 0.5A 350mW Automotive 3-Pin SOT-23 T/R", Case/Package=SOT-23, Collector Emitter Breakdown Voltage=45V, Collector Emitter Saturation Voltage=-700mV, Collector-emitter Voltage-Max=700mV, Emitter Base Voltage (VEBO)=5V, Frequency=100MHz, Manufacturer=Diodes, Max Collector Current=500mA, Max Operating Temperature=150°C, Max Power Dissipation=310mW, Min Operating Temperature=-65°C, Package Quantity=3000, Supplier Part Number 1=BC807-25FDICT-ND, Category=BJTs, Collector Emitter Voltage (VCEO)=45V, ComponentLink1Description=https://datasheet.ciiva.com/6360/ds11208-6360807.pdf?src-supplier=Digi-Key, ComponentLink1URL=https://datasheet.lcsc.com/lcsc/1912111437_KEXIN-KST8550D_C382284.pdf, ComponentLink2Description=https://datasheet.ciiva.com/16614/ds11208-16614428.pdf?src-supplier=Avnet+Europe, ComponentLink2URL=https://datasheet.lcsc.com/lcsc/1912111437_KEXIN-KST8550D_C382284.pdf, Contact Plating=Tin,Matte, Element Configuration=Single, Gain Bandwidth Product=100MHz, Height=1mm, Lead Free="Lead Free", Length=3.05mm, Manufacturer Part Number=KST8550D, Max Breakdown Voltage=45V, Mount="Surface Mount", Number of Elements=1, Number of Pins=3, Packaging="Tape and Reel", Polarity=PNP, Power Dissipation=310mW, Pricing 1="1=0.37000, 10=0.30000, 100=0.15890, 500=0.10454, 1000=0.07109 (USD)", REACH SVHC="No SVHC", RoHS=Yes, RoHS Compliant=Yes, Series=-, Stock 1=1770, Supplier 1=Digi-Key, Transition Frequency=100MHz, Weight=0.000282oz, Width=1.4mm
Q8 Q9: "Transistor BJT NPN", Arrow Part Number=MMBT8050, Manufacturer_Name="Comchip Technology", Datasheet Link=https://datasheet.lcsc.com/lcsc/1912111437_PJSEMI-MMBT8050D_C411762.pdf, Height=1.15mm, Manufacturer_Part_Number=MMBT8050, Mouser Part Number=MMBT8050
R1 R2 R3 R4 R5 R6 R7 R8 R9 R10 R11 R12 R13 R14 R15 R16 R17 R18 R19 R20 R21 R22 R23 R24 R25 R26 R27 R28 R29 R34 R35 R36 R37 R38 R39 R40 R41 R42 R43 R44: library part Res, Case Code (Imperial)=1206, Case Code (Metric)=3216, Case/Package=0603, Manufacturer=Panasonic, Manufacturer Part Number=ERJ-8GEYJ621V, Max Operating Temperature=155°C, Max Power Dissipation=250mW, Min Operating Temperature=-55°C, Package Quantity=1, Resistance=620R, Resistance Tolerance=5%, Resistor Type="Thick Film", Supplier Part Number 1=65T8955, Temperature Coefficient=200ppm/°C, Voltage Rating=200V, ComponentLink1Description=Datasheet, ComponentLink1URL=https://datasheet.ciiva.com/15193/getdatasheetpartid-366470-15193725.pdf?src-supplier=Verical, ComponentLink2Description=https://datasheet.ciiva.com/46387/1500035-46387094.pdf?src-supplier=Element14, ComponentLink2URL=https://datasheet.ciiva.com/46387/1500035-46387094.pdf?src-supplier=Element14, ComponentLink3Description=https://datasheet.ciiva.com/5915/1500035-5915369.pdf?src-supplier=Farnell, ComponentLink3URL=https://datasheet.ciiva.com/5915/1500035-5915369.pdf?src-supplier=Farnell, ComponentLink4Description=https://datasheet.ciiva.com/28677/1678796-28677018.pdf?src-supplier=Element14, ComponentLink4URL=https://datasheet.ciiva.com/28677/1678796-28677018.pdf?src-supplier=Element14, ComponentLink5Description=https://datasheet.ciiva.com/17204/aoa0000ce1-17204972.pdf?src-supplier=Avnet+Europe, ComponentLink5URL=https://datasheet.ciiva.com/17204/aoa0000ce1-17204972.pdf?src-supplier=Avnet+Europe, ComponentLink6Description=https://datasheet.ciiva.com/16515/aoa0000ce1-16515933.pdf?src-supplier=Avnet+Asia, ComponentLink6URL=https://datasheet.ciiva.com/16515/aoa0000ce1-16515933.pdf?src-supplier=Avnet+Asia, Construction=Rectangular, Contact Plating=Tin, Depth=1.6mm, Features="Automotive AEC-Q200", Height=0.028inch, Lead Free="Lead Free", Length=3.2mm, Military Standard=Not, Mount="Surface Mount", Number of Terminations=2, Packaging="Tape and Reel", Power Rating=250mW, Pricing 1="1 = 0.01200 (USD)", Radiation Hardening=No, REACH SVHC="No SVHC", RoHS=Yes, RoHS Compliant=Yes, Series=ERJ, Stock 1=6255, Supplier 1=Avnet, Tolerance=5%, Voltage Rating (DC)=200V, Width=0.063inch
R30 R31 R32 R33: library part res1, "Resistor", Published=8-Jun-2000, Publisher="Altium Limited", Revision="July-2002: Re-released for DXP Platform."
U1: library part SPX3819, "Linear Voltage Regulator IC 1 Output 500mA SOT-23-5", Package="SOT-23-5 MaxLinear, Inc.", Availability=Unavailable, MF="MaxLinear, Inc.", MP=SPX3819, Price=None, SnapEDA_Link=https://www.snapeda.com/parts/SPX3819/MaxLinear,%20Inc./view-part/885098/?ref=snap
U2: library part ESP32-WROOM-32, "Bluetooth, WiFi Transceiver Module 2.4GHz ~ 2.5GHz Surface Mount", Package="Module Espressif Systems", Digi-Key_Part_Number=1904-1010-1-ND, Digi-Key_Purchase_URL=https://www.digikey.com/product-detail/en/espressif-systems/ESP32-WROOM-32/1904-1010-1-ND/8544305?utm_source=snapeda&utm_medium=aggregator&utm_campaign=symbol, MF="Espressif Systems", MP=ESP32-WROOM-32, SnapEDA_Link=https://www.snapeda.com/parts/ESP32-WROOM-32/Espressif%20Systems/view-part/2753322/?ref=snap
U3: "11-V, 1-A H-bridge motor driver 8-WSON -40 to 85", Package="WSON-8 Texas Instruments", Availability=Good, DigiKey-Purchase-URL=https://snapeda.com/shop?store=DigiKey&id=617854, MF="Texas Instruments", Mouser-Purchase-URL=https://snapeda.com/shop?store=Mouser&id=617854, MP=DRV8837CDSGR, Price=None, SnapEDA_Link=https://www.snapeda.com/parts/DRV8837CDSGR/Texas%20Instruments/view-part/617854/?ref=snap, Texas_Instruments-Purchase-URL=https://snapeda.com/shop?store=Texas+Instruments&id=617854
Q6: Availability=Unavailable, Datasheet=http://www.szjuquan.com/upload_files/qb_sell_/pdf/MI2301.pdf, MP=MI2301, Price=None

## Free pads (board coordinates)
  round 137.8 hole 137.8 unplated: 11(196.85,196.85) 12(196.85,3582.68) 13(1377.95,3582.68) 14(2401.57,3582.68) 15(3582.68,3582.68) 16(3582.68,196.85)

## Via types
v1: diameter 23.62, hole 11.81, Top Layer to Bottom Layer, tented both sides, 394 vias
v2: diameter 39.37, hole 19.68, Top Layer to Bottom Layer, tented both sides, 100 vias
v3: diameter 31.5, hole 15.75, Top Layer to Bottom Layer, tented both sides, 6 vias

## Nets (pads, with @x,y where several pads share a name; then routed paths per layer and width w, separated by ;. In a path a pad name is that pad's centre, name@x,y a point inside that pad or via, vN(x,y) a via of type N, cw(c..) or ccw(c..) an arc to the next point about the centre after c; other vN are vias at no path point)
3.3V_MCU: J7.4 Q6.3 R11.1 R12.1 R13.1 R14.1 R16.2 R18.2 R19.2 R20.2 R24.1 R25.2 R26.2 R27.2 R28.2 R43.2 R44.2 U2.2 | length 9726.6
  Top Layer w25: v2(932.35,2347.24) 1219.3,2347.24 U2.2@1220.47,2346.06 ; R44.2@1033.46,960.63 1031.94,959.1 R43.2@1031.94,885.33 1087.11,885.33 1177.17,795.28 1417.32,795.28 1509.06,795.28 1713.78,1000 1885.83,1000 1927.17,958.66 R20.2@1927.17,901.57 ; R18.2@1820.87,901.57 R20.2@1927.17,901.57 ; v2(2114.17,1649.61) 2114.17,1481.11 2174.92,1420.36 2689.87,1420.36 v2(2830.71,1279.53) 3515.75,1279.53 3586.61,1208.66 3586.61,555.12 3488.19,456.69 3185.04,456.69 2846.46,795.28 2574.8,795.28 2517.72,738.19 R28.2@2366.14,738.19 R27.2@2221.39,738.19 ; R25.2@2324.8,606.3 R26.2@2222.44,606.3 2222.44,737.14 R27.2@2221.39,738.19 ; R20.2@1927.17,901.57 1927.17,820.87 2009.84,738.19 R27.2@2221.39,738.19
  Bottom Layer w25: v2(645.67,2901.57) 665.35,2881.89 v2(665.35,2429.13) 747.25,2347.24 v2(932.35,2347.24) 932.35,2046.52 866.14,1980.31 866.14,1806.1 1058.48,1613.77 2078.34,1613.77 v2(2114.17,1649.61) ; v2(2830.71,1279.53) 2830.71,1082.68 3059.06,854.33 J7.4@3389.76,854.33
  other v2: 700.79,2901.57
+5V_USB1: D1.2 IC2.4 J1.A4 J1.A9 J1.B4 J1.B9 TB1.1 | length 5449.4
  Top Layer w30: v2(1508.86,3142.72) 1508.86,3500.98 1613.83,3605.96 TB1.1@1758.4,3605.96
  Bottom Layer w20: v2(1508.86,3142.72) 1497.74,3131.6 696.49,3131.6 591.58,3026.69 591.58,2887.44 618.11,2860.91 618.11,1850.27 666.57,1801.81 825.45,1801.81 1051.59,1575.68 2155.69,1575.68 2229.35,1649.33 2229.35,1812.88 2276.38,1859.92 2370.03,1859.92 2420.48,1809.46 2420.48,1708.66 2423.39,1708.66 2444.88,1687.17 2545.44,1687.17 2567.91,1709.65 v2(2567.91,1937.99)
B+: C1.1 IC1.2 IC1.3 IC2.3 IC3.1 J2.2 Q1.4 R8.2
B-: C7.2 IC4.6 J2.1 Q2.2 Q2.3
DTR: J7.1 Q5.2 R21.1 | length 2594.9
  Top Layer w20: R21.1@1905.51,1100.39 1909.45,1104.33 Q5.2@2035.43,1104.33 2035.43,1047.24 2078.74,1003.94 2783.46,1003.94 3244.09,543.31 3484.25,543.31 3539.37,598.43 3539.37,1098.43 3488.19,1149.61 J7.1@3389.76,1149.61
EN: Q3.3 U2.3 | length 3771.8
  Top Layer w20: v2(338.58,1885.83) 388.34,1935.58 643.9,1935.58 822.05,2113.74 905.02,2113.74 1087.35,2296.06 U2.3@1220.47,2296.06 ; Q3.3@1625.98,1141.73 1625.98,1000 1626.14,999.85 v2(1626.14,996.55)
  Bottom Layer w20: v2(338.58,1885.83) 405.51,1818.9 440.94,1818.9 590.55,1669.29 590.55,1562.99 318.9,1291.34 318.9,1007.87 507.87,818.9 1444.88,818.9 1622.53,996.55 v2(1626.14,996.55)
Fingerprint_INT: R15.2 U2.9 | length 1264.1
  Top Layer w25: v2(887.34,2889.42) 887.34,2891.23 889.76,2893.65 R15.2@889.76,2966.54 ; v2@1055.12,1996.06 U2.9@1220.47,1996.06
  Bottom Layer w25: v2(887.34,2889.42) 887.34,2683.52 1066,2504.87 1066,2128.99 1005.7,2068.69 1005.7,2018.68 1028.31,1996.06 v2(1047.24,1996.06)
GND: C1.2 C2.2 C3.2 C4.2 C5.2 C6.2 C8.2 C9.2 IC1.1 IC1.4 IC1.6 IC1.9 IC2.2 IC3.2 IC3.3 J1.A1 J1.A12 J1.B1 J1.B12 J1.S1 J1.S2 J1.S3 J1.S4 J3.4 J4.1 J4.2 J4.MP1 J4.MP2 J5.2 J5.S1 J5.S2 J7.6 J8.2 J9.2 J10.2 J11.2 Q2.6 Q2.7 Q4.2 Q8.2 Q9.2 R1.1 R2.2 R6.2 R9.2 R10.2 R17.2 R39.1 R41.2 TB3.1 U1.2 U2.1 U2.15 U2.38 U2.39_1 U2.39_2 U2.39_3 U2.39_4 U2.39_5 U2.39_6 U2.39_7 U2.39_8 U2.39_9 U2.39_10 U2.39_11 U2.39_12 U2.39_13 U2.39_14 U2.39_15 U2.39_16 U2.39_17 U2.39_18 U2.39_19 U2.39_20 U2.39_21 U3.4
  other v1: 107.63,114.84 343.85,114.84 461.96,114.84 580.07,114.84 698.18,114.84 816.29,114.84 934.4,114.84 1052.51,114.84 1170.62,114.84 1288.73,114.84 1406.84,114.84 1524.95,114.84 1643.06,114.84 1761.17,114.84 1879.28,114.84 1997.39,114.84 2115.5,114.84 2233.61,114.84 2351.72,114.84 2469.83,114.84 2587.94,114.84 2706.05,114.84 2824.16,114.84 2942.27,114.84 3060.38,114.84 3178.49,114.84 3296.6,114.84 3414.71,114.84 3532.82,114.84 3650.93,114.84 284.79,232.95 402.9,232.95 521.01,232.95 639.12,232.95 757.23,232.95 875.34,232.95 993.45,232.95 1111.56,232.95 1229.68,232.95 1347.79,232.95 1465.9,232.95 1584.01,232.95 1702.12,232.95 1820.23,232.95 1938.34,232.95 2056.45,232.95 2174.56,232.95 2292.67,232.95 2410.78,232.95 2528.89,232.95 2647,232.95 2765.11,232.95 2883.22,232.95 3001.33,232.95 3119.44,232.95 3237.55,232.95 3355.66,232.95 3473.77,232.95 3709.99,232.95 107.63,351.06 225.74,351.06 343.85,351.06 461.96,351.06 580.07,351.06 698.18,351.06 816.29,351.06 934.4,351.06 1052.51,351.06 1170.62,351.06 1288.73,351.06 1406.84,351.06 1524.95,351.06 1643.06,351.06 1761.17,351.06 1879.28,351.06 1997.39,351.06 2115.5,351.06 2233.61,351.06 2351.72,351.06 2469.83,351.06 2587.94,351.06 2706.05,351.06 2824.16,351.06 2942.27,351.06 3060.38,351.06 3178.49,351.06 3296.6,351.06 3414.71,351.06 3532.82,351.06 3650.93,351.06 284.79,469.17 402.9,469.17 521.01,469.17 639.12,469.17 757.23,469.17 875.34,469.17 993.45,469.17 1111.56,469.17 1229.68,469.17 1347.79,469.17 1465.9,469.17 1584.01,469.17 1702.12,469.17 1820.23,469.17 1938.34,469.17 2056.45,469.17 2174.56,469.17 2292.67,469.17 2410.78,469.17 2528.89,469.17 2647,469.17 2765.11,469.17 2883.22,469.17 3001.33,469.17 3119.44,469.17 3591.88,469.17 3709.99,469.17 225.74,587.28 2587.94,587.28 2706.05,587.28 2824.16,587.28 2942.27,587.28 3296.6,587.28 3414.71,587.28 3650.93,587.28 166.68,705.39 521.01,705.39 639.12,705.39 757.23,705.39 875.34,705.39 1229.68,705.39 1347.79,705.39 2528.89,705.39 2883.22,705.39 3237.55,705.39 3355.66,705.39 3473.77,705.39 3709.99,705.39 107.63,823.5 343.85,823.5 1643.06,823.5 1879.28,823.5 1997.39,823.5 2115.5,823.5 2469.83,823.5 3650.93,823.5 639.12,941.61 757.23,941.61 2056.45,941.61 2174.56,941.61 2292.67,941.61 3473.77,941.61 3709.99,941.61 107.63,1059.72 1288.73,1059.72 1761.17,1059.72 1879.28,1059.72 1997.39,1059.72 2115.5,1059.72 2233.61,1059.72 2351.72,1059.72 2469.83,1059.72 2587.94,1059.72 2706.05,1059.72 3650.93,1059.72 402.9,1177.83 1111.56,1177.83 1229.68,1177.83 1584.01,1177.83 2883.22,1177.83 3001.33,1177.83 3119.44,1177.83 3237.55,1177.83 3709.99,1177.83 107.63,1295.94 580.07,1295.94 698.18,1295.94 816.29,1295.94 934.4,1295.94 1170.62,1295.94 1288.73,1295.94 1524.95,1295.94 1761.17,1295.94 1879.28,1295.94 1997.39,1295.94 2233.61,1295.94 2351.72,1295.94 2469.83,1295.94 3650.93,1295.94 875.34,1414.05 3473.77,1414.05 3591.88,1414.05 3709.99,1414.05 107.63,1532.16 698.18,1532.16 816.29,1532.16 2824.16,1532.16 2942.27,1532.16 3060.38,1532.16 3178.49,1532.16 3296.6,1532.16 3532.82,1532.16 3650.93,1532.16 1111.56,1650.27 1229.68,1650.27 1820.23,1650.27 3591.88,1650.27 3709.99,1650.27 2480.32,1732.28 2519.69,1732.28 107.63,1768.38 1052.51,1768.38 1288.73,1768.38 1406.84,1768.38 1524.95,1768.38 1643.06,1768.38 1761.17,1768.38 2942.27,1768.38 3296.6,1768.38 3414.71,1768.38 3650.93,1768.38 1347.79,1886.49 1465.9,1886.49 1584.01,1886.49 1702.12,1886.49 1820.23,1886.49 3591.88,1886.49 3709.99,1886.49 107.63,2004.6 1288.73,2004.6 1643.06,2004.6 1761.17,2004.6 166.68,2122.71 284.79,2122.71 1347.79,2122.71 1702.12,2122.71 1820.23,2122.71 3355.66,2122.71 3473.77,2122.71 3591.88,2122.71 3709.99,2122.71 107.63,2240.82 1288.73,2240.82 1406.84,2240.82 1524.95,2240.82 1643.06,2240.82 1761.17,2240.82 2351.72,2240.82 3178.49,2240.82 3650.93,2240.82 166.68,2358.93 1347.79,2358.93 1465.9,2358.93 1584.01,2358.93 1702.12,2358.93 1820.23,2358.93 2056.45,2358.93 3119.44,2358.93 3473.77,2358.93 3591.88,2358.93 3709.99,2358.93 107.63,2477.04 1170.62,2477.04 2469.83,2477.04 3650.93,2477.04 166.68,2595.15 1111.56,2595.15 1938.34,2595.15 2056.45,2595.15 3237.55,2595.15 3473.77,2595.15 3591.88,2595.15 3709.99,2595.15 107.63,2713.26 1288.73,2713.26 1406.84,2713.26 1524.95,2713.26 1643.06,2713.26 1761.17,2713.26 1879.28,2713.26 2824.16,2713.26 2942.27,2713.26 3650.93,2713.26 166.68,2831.38 1111.56,2831.38 3591.88,2831.38 3709.99,2831.38 107.63,2949.49 934.4,2949.49 1052.51,2949.49 3650.93,2949.49 166.68,3067.6 284.79,3067.6 993.45,3067.6 1111.56,3067.6 1229.68,3067.6 1347.79,3067.6 1465.9,3067.6 1702.12,3067.6 2410.78,3067.6 3237.55,3067.6 3355.66,3067.6 3473.77,3067.6 3591.88,3067.6 3709.99,3067.6 107.63,3185.71 343.85,3185.71 1288.73,3185.71 1406.84,3185.71 2351.72,3185.71 2469.83,3185.71 2587.94,3185.71 2706.05,3185.71 2824.16,3185.71 3414.71,3185.71 3650.93,3185.71 166.68,3303.82 284.79,3303.82 521.01,3303.82 875.34,3303.82 1111.56,3303.82 1229.68,3303.82 1347.79,3303.82 1820.23,3303.82 1938.34,3303.82 2528.89,3303.82 2647,3303.82 2765.11,3303.82 3355.66,3303.82 3473.77,3303.82 107.63,3421.93 225.74,3421.93 461.96,3421.93 698.18,3421.93 934.4,3421.93 1170.62,3421.93 1288.73,3421.93 1406.84,3421.93 1643.06,3421.93 1761.17,3421.93 1879.28,3421.93 1997.39,3421.93 2115.5,3421.93 2233.61,3421.93 2351.72,3421.93 2469.83,3421.93 3650.93,3421.93 284.79,3540.04 757.23,3540.04 875.34,3540.04 993.45,3540.04 1111.56,3540.04 1229.68,3540.04 1465.9,3540.04 1702.12,3540.04 1820.23,3540.04 1938.34,3540.04 2056.45,3540.04 2174.56,3540.04 2292.67,3540.04 2528.89,3540.04 2647,3540.04 2765.11,3540.04 2883.22,3540.04 3355.66,3540.04 3473.77,3540.04 3709.99,3540.04 107.63,3658.15 343.85,3658.15 461.96,3658.15 580.07,3658.15 698.18,3658.15 816.29,3658.15 934.4,3658.15 1052.51,3658.15 1170.62,3658.15 1288.73,3658.15 1524.95,3658.15 1643.06,3658.15 1761.17,3658.15 1879.28,3658.15 1997.39,3658.15 2115.5,3658.15 2233.61,3658.15 2469.83,3658.15 2587.94,3658.15 2706.05,3658.15 2824.16,3658.15 2942.27,3658.15 3060.38,3658.15 3178.49,3658.15 3296.6,3658.15 3414.71,3658.15 3650.93,3658.15
  other v2: 1559.06,1334.65 1807.09,1359.81 2172.56,1502.24 3133.86,1834.65 3000,1846.46 952.76,1956.69 488.19,2008.65 295.28,2015.75 2850.39,2106.3 744.09,2122.05 2468.5,2251.97 2059.06,2258.85 974.53,2275.68 484.25,2318.9 693.05,2319.97 3220.47,2330.71 2688.98,2500 2551.18,2515.75 3196.85,2586.61 296.1,2619.76 2114.17,2688.98 3181.1,3098.43 311.02,3157.48 3370.08,3251.97 409.45,3283.46 1157.48,3303.15 1193.9,3371.06 3011.81,3472.44
  other v3: 3064.79,3159.05 2973.22,3166.06